# Altium PCB 气象传感器.PcbDoc (part 1 of 2)
Units mm, origin at the board's own origin, x right, y up, seen from the top; angles counter-clockwise.
Board outline 72.46 x 63.14 mm, 2 copper layers (Top Layer, Bottom Layer); 117 components, 86 nets, 422 pads, 155 vias.
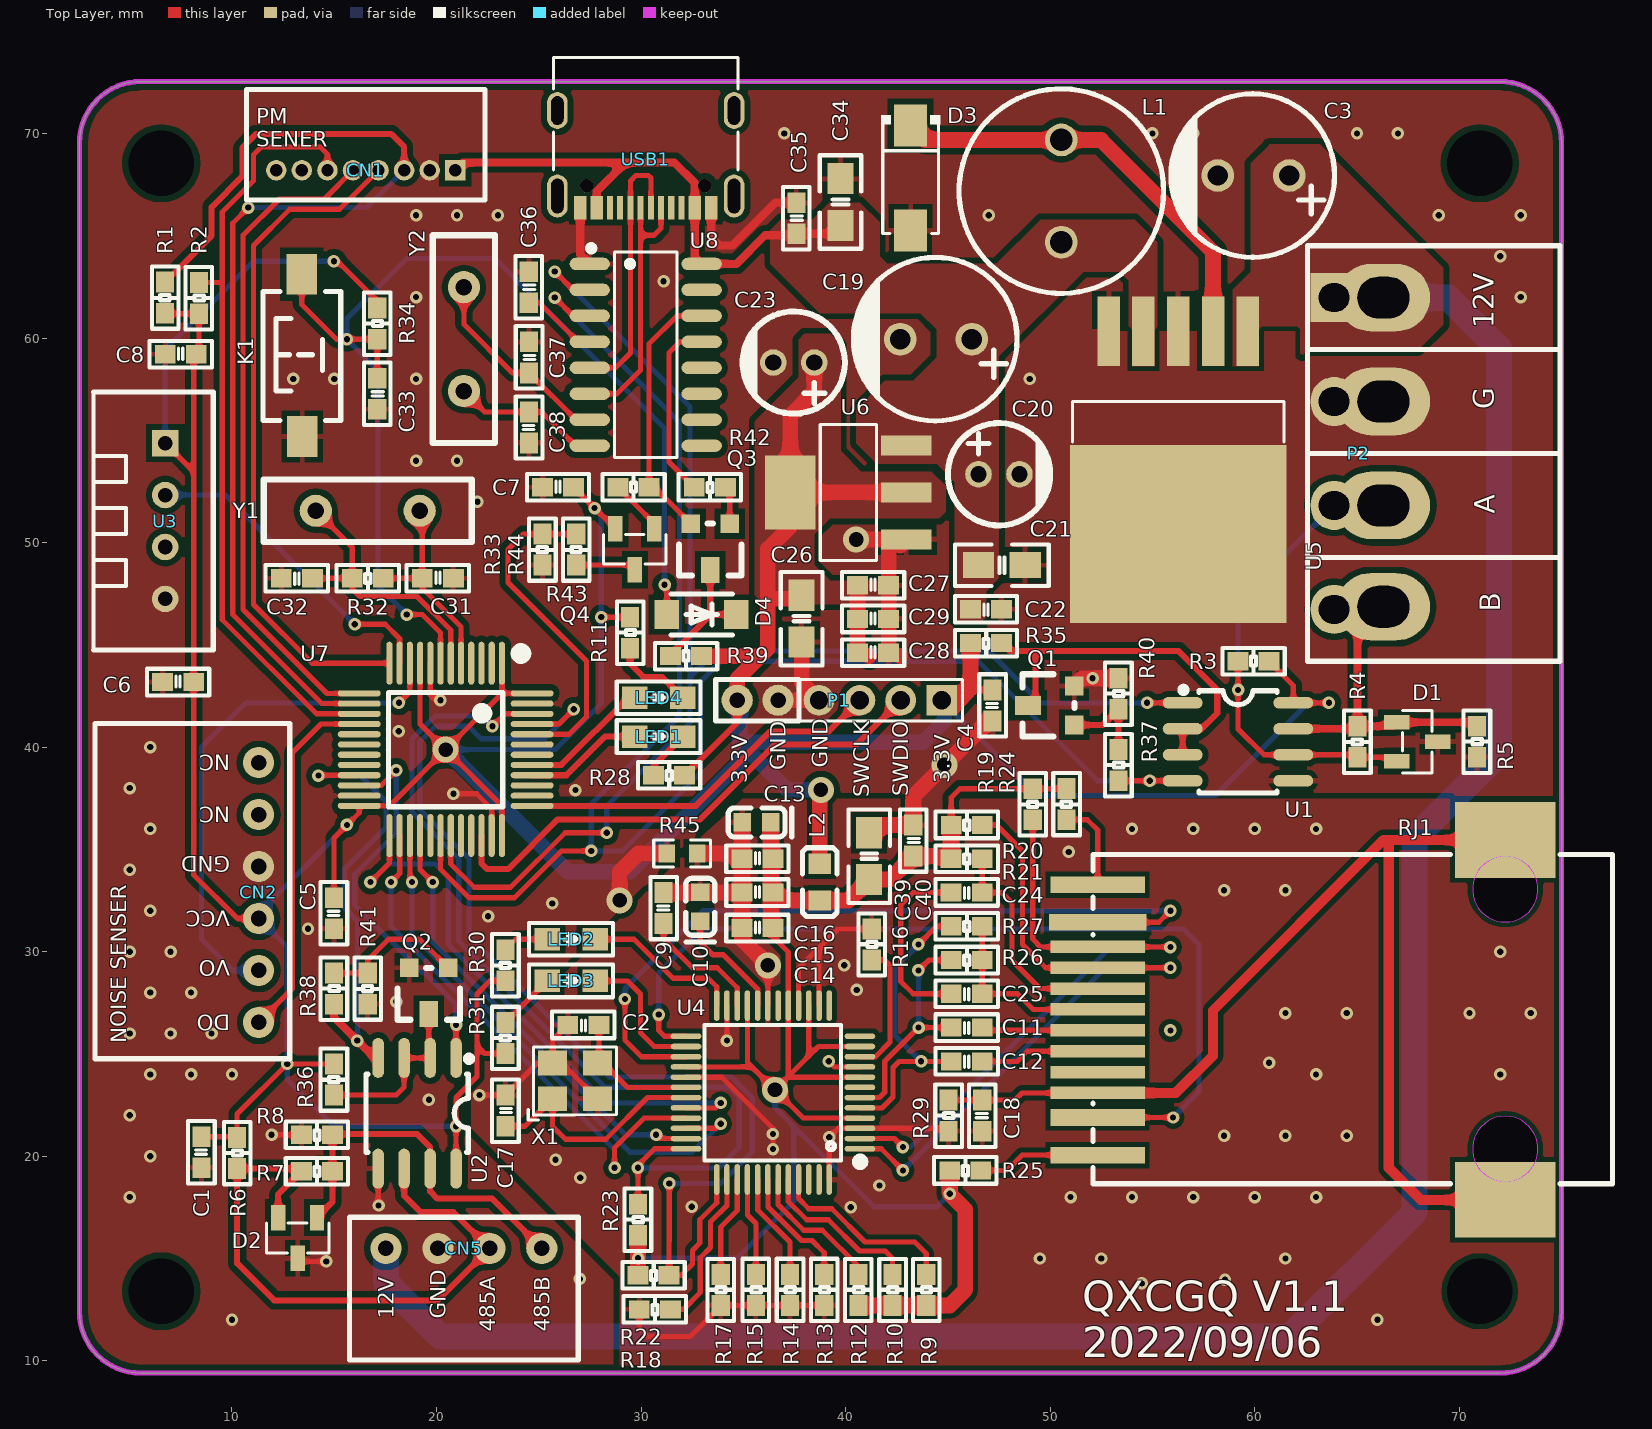
[diagram p0: Top Layer view]
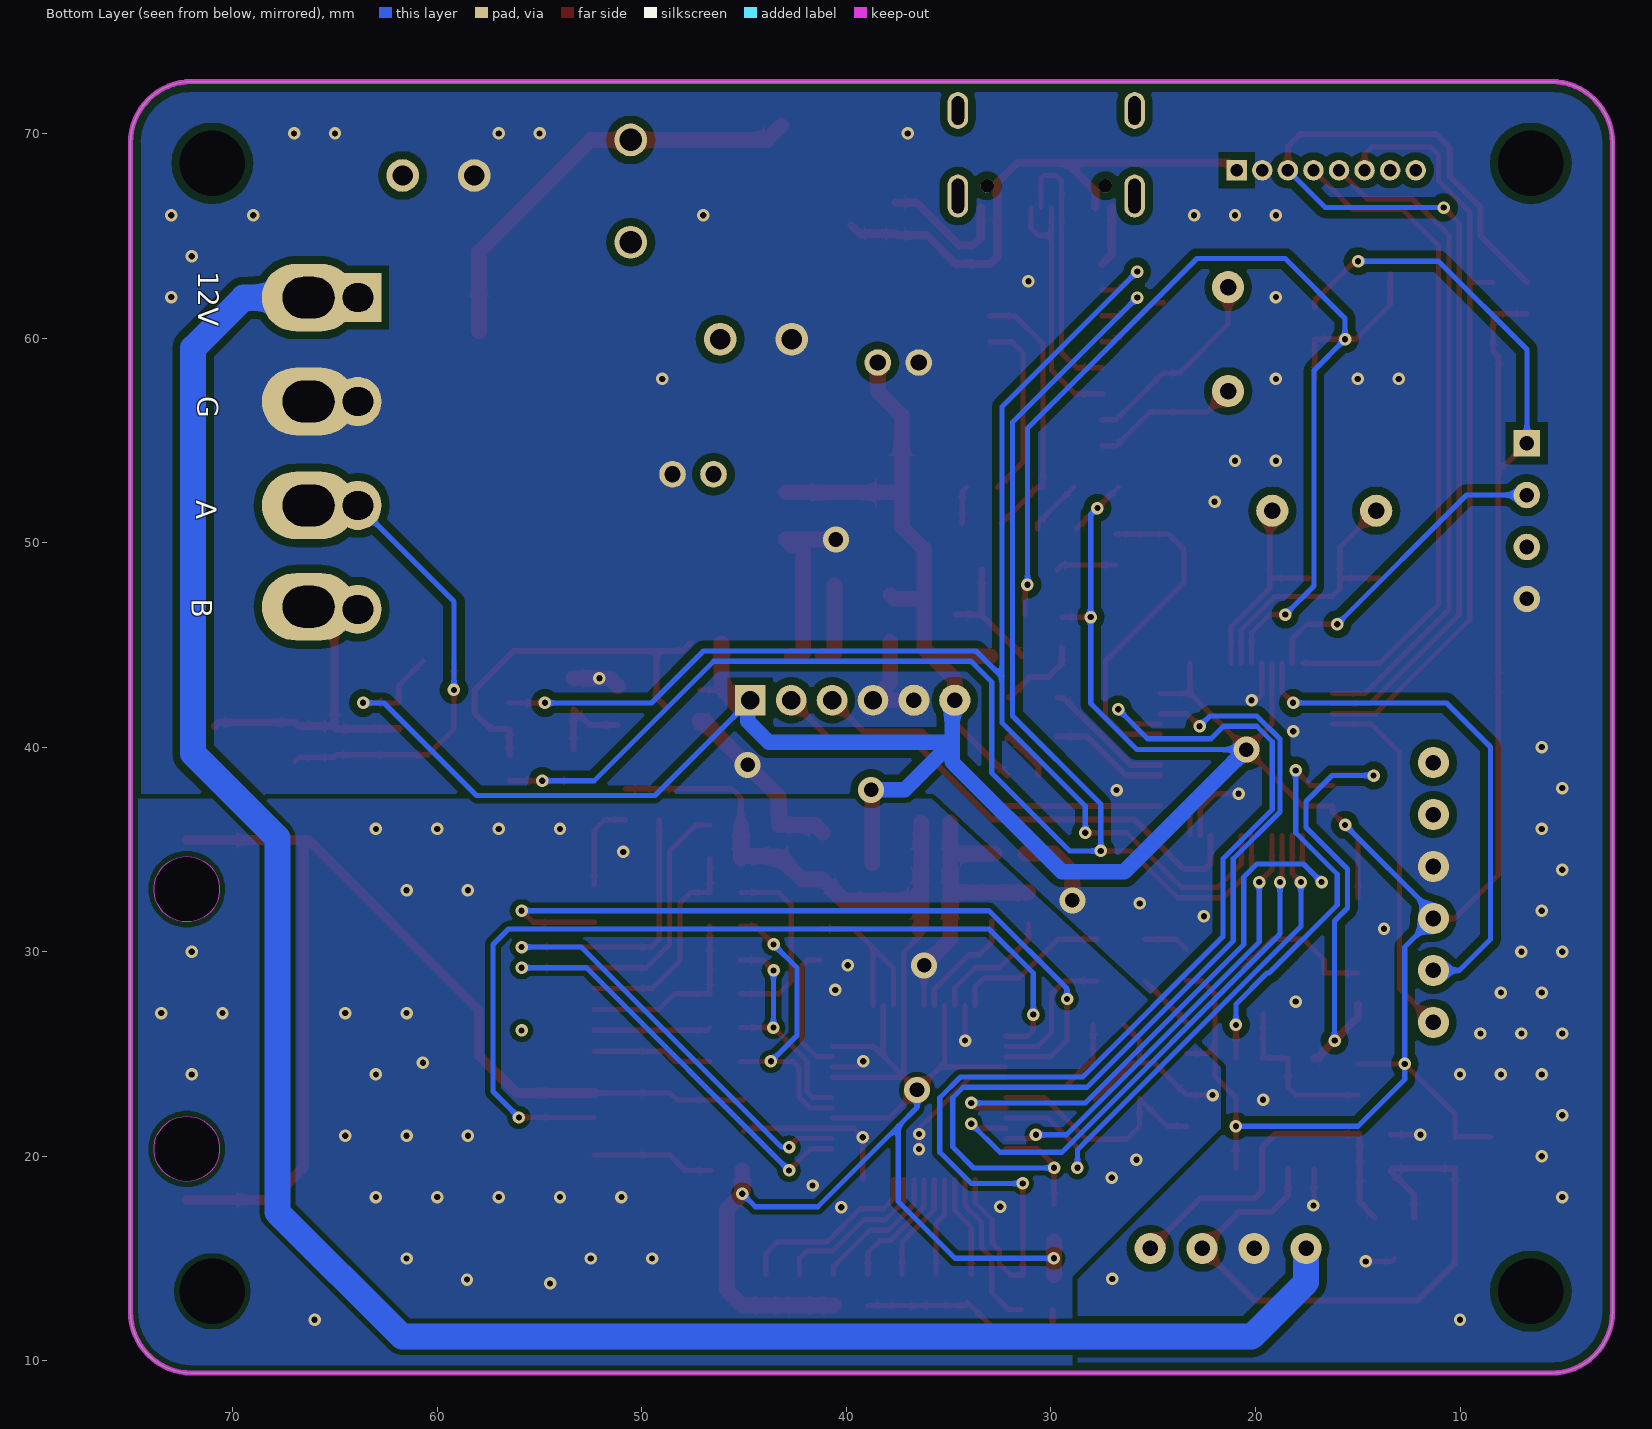
[diagram p1: Bottom Layer view, seen from below]

## Layer stack, top to bottom
Top Solder: solder mask 0.0102, Solder Resist, Dk 3.5
Top Layer: signal copper 0.0356
Dielectric 1: dielectric 0.32, FR-4, Dk 4.8
Bottom Layer: signal copper 0.0356
Bottom Solder: solder mask 0.0102, Solder Resist, Dk 3.5

## Board outline
5.54,9.398 cw(c5.54,12.398) 2.54,12.398 2.54,69.54 cw(c5.54,69.54) 5.54,72.54 72.001,72.54 cw(c72.001,69.54) 75.001,69.54 74.999,69.54 74.999,12.398 cw(c71.999,12.398) 71.999,9.398

## Design rules (kind name [scope] priority, off if disabled: settings)
Clearance Clearance_10 [InNamedPolygon('7805 GND')] p1: gap=0.254 ignorepadtopadclearanceinfootprint=FALSE
Clearance Clearance_9 [InNamedPolygon('TOP GND')] p2: gap=0.3 ignorepadtopadclearanceinfootprint=FALSE
Clearance Clearance_8 [InNamedPolygon('AGND')] p3: gap=0.254 ignorepadtopadclearanceinfootprint=FALSE
Clearance Clearance_7 [InNamedPolygon('AGND')] p4: gap=0.254 ignorepadtopadclearanceinfootprint=FALSE
Clearance Clearance_6 [InNamedPolygon('3.3V')] p5: gap=0.006 ignorepadtopadclearanceinfootprint=FALSE
Clearance Clearance_5 [InNamedPolygon('5V')] p6: gap=0.006 ignorepadtopadclearanceinfootprint=FALSE
Clearance Clearance_4 [InNamedPolygon('12V')] p7: gap=0.006 ignorepadtopadclearanceinfootprint=FALSE
Clearance Clearance_3 [InNamedPolygon('BOTTOM GND')] p8: gap=0.381 ignorepadtopadclearanceinfootprint=FALSE
Clearance Clearance_2 [InNamedPolygon('BOTTOM GND')] p9: gap=0 ignorepadtopadclearanceinfootprint=FALSE
Clearance Clearance_1 [InNamedPolygon('TOP GND')] p10: gap=0.381 ignorepadtopadclearanceinfootprint=FALSE
Clearance [All] p11: gap=0 ignorepadtopadclearanceinfootprint=TRUE
ComponentClearance [All] p1 off: gap=0.254 collisioncheckmode=3 verticalgap=0.254 showdistances=FALSE
HoleSize [All] p1 off: absolutevalues=TRUE maxlimit=2.54 minlimit=0.025 maxpercent=80.000 minpercent=20.000
MinimumSolderMaskSliver [All] p1 off: minsoldermaskwidth=0.127
PolygonConnect PolygonConnect_12 [All vs IsNamedPolygon('BOTTOM GND')] p1: thpad.connectstyle=Direct thpad.reliefconductorwidth=0.254 thpad.reliefentries=4 thpad.polygonreliefangle="90 Angle" thpad.airgapwidth=0.254 smdpad.connectstyle=Relief smdpad.reliefconductorwidth=0.254 smdpad.reliefentries=4 smdpad.polygonreliefangle="90 Angle" smdpad.airgapwidth=0.254 via.connectstyle=Direct via.reliefconductorwidth=0.254 via.reliefentries=4 via.polygonreliefangle="90 Angle" via.airgapwidth=0.254
PolygonConnect PolygonConnect_11 [All vs IsNamedPolygon('TOP GND')] p2: thpad.connectstyle=Direct thpad.reliefconductorwidth=0.254 thpad.reliefentries=4 thpad.polygonreliefangle="90 Angle" thpad.airgapwidth=0.254 smdpad.connectstyle=Relief smdpad.reliefconductorwidth=0.254 smdpad.reliefentries=4 smdpad.polygonreliefangle="90 Angle" smdpad.airgapwidth=0.254 via.connectstyle=Direct via.reliefconductorwidth=0.254 via.reliefentries=4 via.polygonreliefangle="90 Angle" via.airgapwidth=0.254
PolygonConnect PolygonConnect_10 [All vs IsNamedPolygon('AGND')] p3: thpad.connectstyle=Direct thpad.reliefconductorwidth=0.254 thpad.reliefentries=4 thpad.polygonreliefangle="90 Angle" thpad.airgapwidth=0.254 smdpad.connectstyle=Relief smdpad.reliefconductorwidth=0.254 smdpad.reliefentries=4 smdpad.polygonreliefangle="90 Angle" smdpad.airgapwidth=0.254 via.connectstyle=Direct via.reliefconductorwidth=0.254 via.reliefentries=4 via.polygonreliefangle="90 Angle" via.airgapwidth=0.254
PolygonConnect PolygonConnect_9 [All vs IsNamedPolygon('AGND')] p4: thpad.connectstyle=Direct thpad.reliefconductorwidth=0.254 thpad.reliefentries=4 thpad.polygonreliefangle="90 Angle" thpad.airgapwidth=0.254 smdpad.connectstyle=Relief smdpad.reliefconductorwidth=0.254 smdpad.reliefentries=4 smdpad.polygonreliefangle="90 Angle" smdpad.airgapwidth=0.254 via.connectstyle=Direct via.reliefconductorwidth=0.254 via.reliefentries=4 via.polygonreliefangle="90 Angle" via.airgapwidth=0.254
PolygonConnect PolygonConnect_8 [All vs IsNamedPolygon('AGND')] p5: thpad.connectstyle=Direct thpad.reliefconductorwidth=0.254 thpad.reliefentries=4 thpad.polygonreliefangle="90 Angle" thpad.airgapwidth=0.254 smdpad.connectstyle=Relief smdpad.reliefconductorwidth=0.254 smdpad.reliefentries=4 smdpad.polygonreliefangle="90 Angle" smdpad.airgapwidth=0.254 via.connectstyle=Relief via.reliefconductorwidth=0.254 via.reliefentries=4 via.polygonreliefangle="90 Angle" via.airgapwidth=0.254
PolygonConnect PolygonConnect_7 [All vs IsNamedPolygon('AGND')] p6: thpad.connectstyle=Direct thpad.reliefconductorwidth=0.254 thpad.reliefentries=4 thpad.polygonreliefangle="90 Angle" thpad.airgapwidth=0.254 smdpad.connectstyle=Relief smdpad.reliefconductorwidth=0.254 smdpad.reliefentries=4 smdpad.polygonreliefangle="90 Angle" smdpad.airgapwidth=0.254 via.connectstyle=Relief via.reliefconductorwidth=0.254 via.reliefentries=4 via.polygonreliefangle="90 Angle" via.airgapwidth=0.254
PolygonConnect PolygonConnect_6 [All vs IsNamedPolygon('3.3V')] p7: connectstyle=Direct reliefconductorwidth=0.254 reliefentries=4 polygonreliefangle="90 Angle" airgapwidth=0.254
PolygonConnect PolygonConnect_5 [All vs IsNamedPolygon('5V')] p8: connectstyle=Direct reliefconductorwidth=0.254 reliefentries=4 polygonreliefangle="90 Angle" airgapwidth=0.254
PolygonConnect PolygonConnect_4 [All vs IsNamedPolygon('12V')] p9: connectstyle=Direct reliefconductorwidth=0.254 reliefentries=4 polygonreliefangle="90 Angle" airgapwidth=0.254
PolygonConnect PolygonConnect_3 [All vs IsNamedPolygon('7805 GND')] p10: connectstyle=Direct reliefconductorwidth=0.254 reliefentries=4 polygonreliefangle="90 Angle" airgapwidth=0.254
PolygonConnect PolygonConnect_2 [All vs IsNamedPolygon('TOP GND')] p11: thpad.connectstyle=Relief thpad.reliefconductorwidth=0.254 thpad.reliefentries=4 thpad.polygonreliefangle="90 Angle" thpad.airgapwidth=0.254 smdpad.connectstyle=Relief smdpad.reliefconductorwidth=0.254 smdpad.reliefentries=4 smdpad.polygonreliefangle="90 Angle" smdpad.airgapwidth=0.254 via.connectstyle=Direct via.reliefconductorwidth=0.254 via.reliefentries=4 via.polygonreliefangle="90 Angle" via.airgapwidth=0.254
PolygonConnect PolygonConnect_1 [All vs IsNamedPolygon('BOTTOM GND')] p12: thpad.connectstyle=Relief thpad.reliefconductorwidth=0.254 thpad.reliefentries=4 thpad.polygonreliefangle="90 Angle" thpad.airgapwidth=0.254 smdpad.connectstyle=Relief smdpad.reliefconductorwidth=0.254 smdpad.reliefentries=4 smdpad.polygonreliefangle="90 Angle" smdpad.airgapwidth=0.254 via.connectstyle=Direct via.reliefconductorwidth=0.254 via.reliefentries=4 via.polygonreliefangle="90 Angle" via.airgapwidth=0.254
PolygonConnect [All] p13: connectstyle=Relief reliefconductorwidth=0.254 reliefentries=4 polygonreliefangle="90 Angle" airgapwidth=0.254
RoutingVias [All] p1: holewidth=0.711 width=1.27 viastyle="Through Hole" minholewidth=0.025 minwidth=0.025 maxholewidth=2.54 maxwidth=2.54
ShortCircuit [All] p1 off: allowed=FALSE
SilkToSilkClearance [All] p1 off: silktosilkclearance=0.254
SilkToSolderMaskClearance [IsPad] p1 off: minsilkscreentomaskgap=0.254 clearancetoexposedcopper=TRUE
SolderMaskExpansion [All] p1: expansion=0.102
Width [All] p1: maxlimit=2.54 minlimit=0.254 preferedwidth=0.254
24 further rules are at their usual default settings.

## Components (designator, comment, footprint, x,y, rotation, side; value= is the part's Value field where it differs from the comment)
C1 "Capacitor" 0603C 8.509,20.195 r270 top value=0.1uf
C2 "Capacitor" 0603C 27.178,26.416 r0 top value=12pf
C3 "Capacitor" CAP-TH_BD8.0-P3.50-D0.6-FD 59.944,67.945 r180 top value="100uf 50v"
C4 "Capacitor" 0603C 47.18,42.037 r270 top value=0.1uf
C5 "Capacitor" 0603C 14.986,31.877 r270 top value=0.1uf
C6 "Capacitor" 0603C 7.366,43.18 r180 top value=0.1uf
C7 "Capacitor" 0603C 25.938,52.705 r180 top value=0.1uf
C8 "Capacitor" 0603C 7.493,59.208 r180 top value=0.1uf
C9 "Capacitor" 0603C 31.103,32.131 r270 top value=10nf
C10 "4.7uF" CAP-SMD_L1.6-W0.9-FD 32.891,32.196 r90 top
C11 "Capacitor" 0603C 45.92,26.289 r0 top value=6.8nf
C12 "Capacitor" 0603C 45.92,24.638 r0 top value=6.8nf
C13 "4.7uF" CAP-SMD_L1.6-W0.9-FD 35.648,36.318 r180 top
C14 "Capacitor" 0603C 35.689,31.153 r180 top value=0.1uf
C15 "Capacitor" 0603C 35.689,32.889 r180 top value=0.1uf
C16 "Capacitor" 0603C 35.689,34.54 r180 top value=0.1uf
C17 "Capacitor" 0603C 23.368,22.227 r90 top value=12pf
C18 "Capacitor" 0603C 46.682,21.982 r270 top value=1nf
C19 "Capacitor" CAP-TH_BD8.0-P3.50-D0.6-FD 44.422,59.944 r180 top value="1000uf 10v"
C20 "Capacitor" CAP-TH_BD5.0-P2.00-D0.8-FD 47.498,53.34 r0 top value="100uf 16v"
C21 "Capacitor" 0805C 46.498,48.895 r0 top value=10uf
C22 "Capacitor" 0603C 46.863,46.736 r0 top value=0.1uf
C23 "Capacitor" CAP-TH_BD5.0-P2.00-D0.8-FD 37.465,58.801 r180 top value="100uf 16v"
C24 "Capacitor" 0603C 45.918,32.893 r0 top value=22nf
C25 "Capacitor" 0603C 45.92,27.94 r0 top value=10nf
C26 "Capacitor" 0805C 37.846,45.138 r90 top value=10uf
C27 "Capacitor" 0603C 41.341,47.917 r180 top value=0.1uf
C28 "Capacitor" 0603C 41.343,44.615 r180 top value=100pf
C29 "Capacitor" 0603C 41.341,46.266 r180 top value=22pf
C31 "Capacitor" 0603C 20.064,48.254 r180 top value=22pf
C32 "Capacitor" 0603C 13.17,48.254 r0 top value=22pf
C33 "Capacitor" 0603C 17.098,57.273 r90 top value=0.1uf
C34 "Capacitor" 0805C 39.751,65.507 r90 top value=10uf
C35 "Capacitor" 0603C 37.592,65.858 r90 top value=0.1uf
C36 "Capacitor" 0603C 24.511,62.482 r90 top value=0.1uf
C37 "Capacitor" 0603C 24.523,59.055 r90 top value=20pf
C38 "Capacitor" 0603C 24.523,55.626 r270 top value=20pf
C39 "Capacitor" 0805C 41.148,33.528 r90 top value=10uf
C40 "Capacitor" 0603C 43.307,35.431 r90 top value=0.1uf
CN1 "DF13-8P-1.25DS(20)" CONN-TH_8P-P1.25_DF13-8P-1.25DS-20 16.54,68.199 r0 top
CN2 "NOISE_SENSER" NOISE_SENSER 11.303,26.543 r90 top
CN5 "RAIN_SENSER" RAIN_SENSER 17.526,15.494 r0 top
D1 "SM712_C908219" SOT-23-3_L2.9-W1.3-P1.90-LS2.4-BR 67.945,40.261 r180 top
D2 "SM712_C908219" SOT-23-3_L2.9-W1.3-P1.90-LS2.4-BR 13.208,16.002 r90 top
D3 "1N5822" SMA_L4.4-W2.8-LS5.4-RD 43.18,67.818 r270 top
D4 "1N4148W-C1884539" SOD-123_4148 32.962,46.482 r0 top
K1 "3x6x5" "TSW SMD-3*6*2.5" 13.415,59.182 r90 top
L1 "100uH" IND-TH_BD10.0-P5.00-D0.7 50.546,67.183 r90 top
L2 "120欧磁珠" L0603 38.735,33.401 r270 top
LED1 "LED" 0603-LED 30.861,40.513 r0 top
LED2 "LED" 0603-LED 26.579,30.607 r180 top
LED3 "LED" 0603-LED 26.579,28.573 r180 top
LED4 "LED" 0603-LED 30.861,42.418 r0 top
P1 "SWD_LINK" SWD_LINK 44.699,42.291 r180 top
P2 "XH2.54_4P" "5.08 LINKER 1*4" 74.168,61.214 r270 top
Q1 "S8050" SOT-23 50.165,42.037 r0 top
Q2 "S8050" SOT-23 19.622,28.194 r90 top
Q3 "S8050" SOT-23 33.379,49.911 r90 top
Q4 "S8550" SOT-23-3_L2.9-W1.3-P1.90-LS2.4-BR 29.693,49.673 r90 top
R1 "Resistor" 0603R 6.731,61.976 r270 top value=10k
R2 "Resistor" 0603R 8.382,61.951 r90 top value=10k
R3 "Resistor" 0603R 59.944,44.196 r180 top value=100k
R4 "Resistor" 0603R 65.024,40.261 r270 top value=120R
R5 "Resistor" 0603R 70.866,40.261 r90 top value=100k
R6 "Resistor" 0603R 10.251,20.154 r90 top value=100k
R7 "Resistor" 0603R 14.152,19.267 r0 top value=120R
R8 "Resistor" 0603R 14.152,21.045 r0 top value=100k
R9 "Resistor" 0603R 43.942,13.462 r90 top value=10K
R10 "Resistor" 0603R 42.294,13.462 r90 top value=10K
R11 "Resistor" 0603R 29.464,45.593 r90 top value=4.7K
R12 "Resistor" 0603R 40.624,13.462 r90 top value=10K
R13 "Resistor" 0603R 38.954,13.464 r90 top value=10K
R14 "Resistor" 0603R 37.283,13.464 r90 top value=10K
R15 "Resistor" 0603R 35.613,13.464 r90 top value=10K
R16 "Resistor" 0603R 41.275,30.353 r90 top value="12.4k 1%"
R17 "Resistor" 0603R 33.893,13.462 r90 top value=10K
R18 "Resistor" 0603R 30.674,12.512 r0 top value=10K
R19 "Resistor" 0603R 49.149,37.209 r270 top value=51R
R20 "Resistor" 0603R 45.92,36.195 r0 top value=51R
R21 "Resistor" 0603R 45.918,34.544 r0 top value=10R
R22 "Resistor" 0603R 30.611,14.182 r0 top value=10K
R23 "Resistor" 0603R 29.845,16.891 r90 top value=10K
R24 "Resistor" 0603R 50.8,37.213 r270 top value=1K
R25 "Resistor" 0603R 45.847,19.304 r0 top value=1K
R26 "Resistor" 0603R 45.92,29.591 r0 top value=82R
R27 "Resistor" 0603R 45.92,31.242 r0 top value=82R
R28 "Resistor" 0603R 31.369,38.628 r0 top value=1K
R29 "Resistor" 0603R 45.031,21.982 r90 top value=1M
R30 "Resistor" 0603R 23.368,29.339 r270 top value=1K
R31 "Resistor" 0603R 23.368,25.781 r270 top value=1K
R32 "Resistor" 0603R 16.635,48.254 r0 top value=1M
R33 "Resistor" 0603R 25.178,49.657 r270 top value=10K
R34 "Resistor" 0603R 17.098,60.704 r90 top value=1M
R35 "Resistor" 0603R 46.863,45.085 r0 top value=100k
R36 "Resistor" 0603R 14.986,23.747 r270 top value=100k
R37 "Resistor" 0603R 53.34,39.118 r90 top value=100k
R38 "Resistor" 0603R 14.986,28.194 r90 top value=100k
R39 "Resistor" 0603R 32.199,44.45 r180 top value=10K
R40 "Resistor" 0603R 53.34,42.608 r90 top value=100k
R41 "Resistor" 0603R 16.637,28.194 r270 top value=100k
R42 "Resistor" 0603R 33.364,52.705 r0 top value=1K
R43 "Resistor" 0603R 29.632,52.705 r180 top value=1K
R44 "Resistor" 0603R 26.829,49.657 r270 top value=1K
R45 "0R" R0603 32.004,34.798 r180 top value=33Ω
RJ1 "HR961160C" RJ45-SMD_HR961160C 62.285,26.664 r270 top
U1 "SP3485EN-L/TR" SOIC-8_L5.0-W4.0-P1.27-LS6.0-BL 59.182,40.259 r270 top
U2 "SP3485EN-L/TR" SOIC-8_L5.0-W4.0-P1.27-LS6.0-BL 19.05,22.098 r180 top
U3 "DHT11" DHT11 6.731,51.054 r270 top
U4 "W5500" LQFP-48_L7.0-W7.0-P0.50-LS9.0-BL 36.449,23.114 r90 top
U5 "LM2576S-5.0_C2920854" TO-263-5_L10.2-W8.6-P1.70-LS14.4-TL 56.261,55.372 r270 top
U6 "AMS1117-3.3_C369933" SOT-223-4_L6.5-W3.5-P2.30-LS7.0-BR 40.132,52.451 r0 top
U7 "STM32F103C8T6" "LQFP48 7X7_M" 20.447,39.878 r180 top
U8 "CH340G" SOIC-16_L9.9-W3.9-P1.27-LS6.0-BL 30.226,59.18 r270 top
USB1 "TYPEC-304A-ACP16O" USB-SMD_TYPEC-304A-ACP16O 30.228,68.748 r180 top
X1 "JYXT32S4-025.00000-93E4C0" OSC-SMD_4P-L3.2-W2.5-BL 26.771,23.682 r0 top value=-
Y1 "8MHZ" XTAL1 16.637,51.556 r0 top
Y2 "12MHz" XTAL1 21.336,59.944 r90 top

## Footprints (in the part's own frame and the unit in brackets; to place one, negate y for a bottom-side part, rotate by r counter-clockwise, add the part's x,y. Pads: shape width x height; smd on the part's side, far side on the other; paste and mask are expansions set on the pad)
"5.08 LINKER 1*4" [mil] "5.08MM间距接线端子"
  oval 130x180 hole 80 slot 100 at 90 deg: 1(-30,-310) 2(170,-310) 3(370,-310) 4(565,-310)
  rect 94.49x90.55 hole 59.06 slot 55.12 at 0 deg: 1(-30,-405)
  oval 94.49x90.55 hole 59.06 slot 55.12 at 0 deg: 2(170,-405) 3(370,-405) 4(570,-405)
  silkscreen extent -130,-456 670,30
0603-LED [mil]
  rect 49x43 smd: 1(46.26,0) 2(-46.26,0)
  silkscreen extent -81,-31 81,31
0603C [mil]
  rect 40x35 smd: 1(-29.92,0) 2(29.92,0)
  silkscreen extent -60,-26 60,26
0603R [mil]
  rect 40x35 smd: 1(-29.92,0) 2(29.92,0)
  silkscreen extent -60,-26 60,26
0805C [mil]
  rect 60x50 smd: 1(0,0) 2(90,0)
  silkscreen extent -45,-40 135,40
CAP-SMD_L1.6-W0.9-FD [mm] "钽电容"
  rect 0.85x0.9 smd mask+0.051: 1(-0.7,0) 2(0.7,0)
  silkscreen extent -1.72,-0.71 1.39,0.71
CAP-TH_BD5.0-P2.00-D0.8-FD [mm] "5*11 （16v 100uf）"
  round 1.3 hole 0.8: 1(-1,0) 2(1,0)
  silkscreen extent -2.5,-2.5 2.5,2.5
CAP-TH_BD8.0-P3.50-D0.6-FD [mm] "8*12 (100uf 50v) (1000uf 10v)"
  round 1.6 hole 1: 1(-1.75,0) 2(1.75,0)
  silkscreen extent -3.96,-4 4.04,4
CONN-TH_8P-P1.25_DF13-8P-1.25DS-20 [mm]
  rect 1x1 hole 0.6: 1(4.375,0)
  round 1 hole 0.6: 2(3.125,0) 3(1.875,0) 4(0.625,0) 5(-0.625,0) 6(-1.875,0) 7(-3.125,0) 8(-4.375,0)
  silkscreen extent -5.83,-1.45 5.83,3.95
DHT11 [mil]
  rect 51x51 hole 28: 1(-150,0)
  round 51 hole 28: 2(-50,0) 3(50,0) 4(150,0)
  silkscreen extent -248,-138 248,93
IND-TH_BD10.0-P5.00-D0.7 [mm] "100uh 电感"
  round 1.6 hole 1.1: 1(-2.5,0) 2(2.5,0)
  silkscreen extent -5,-5 5,5
L0603 [mm]
  rect 1x1.1 smd: 1(-0.9,0) 2(0.9,0)
  silkscreen extent -1.68,-0.85 1.68,0.85
"LQFP48 7X7_M" [mm] "48脚，体宽7x7mm，脚距0.5mm      淘宝ID:黄晶宝石"
  oval 0.3x2.1 smd: 1(-2.75,-4.227) 2(-2.25,-4.227) 3(-1.75,-4.227) 4(-1.25,-4.227) 5(-0.75,-4.227) 6(-0.25,-4.227) 7(0.25,-4.227) 8(0.75,-4.227) 9(1.25,-4.227) 10(1.75,-4.227) 11(2.25,-4.227) 12(2.75,-4.227) 25(2.75,4.202) 26(2.25,4.202) 27(1.75,4.202) 28(1.25,4.202) 29(0.75,4.202) 30(0.25,4.202) 31(-0.25,4.202) 32(-0.75,4.202) 33(-1.25,4.202) 34(-1.75,4.202) 35(-2.25,4.202) 36(-2.75,4.202)
  oval 2.1x0.3 smd: 13(4.227,-2.75) 14(4.227,-2.25) 15(4.227,-1.75) 16(4.227,-1.25) 17(4.227,-0.75) 18(4.227,-0.25) 19(4.227,0.25) 20(4.227,0.75) 21(4.227,1.25) 22(4.227,1.75) 23(4.227,2.25) 24(4.227,2.75) 37(-4.227,2.75) 38(-4.227,2.25) 39(-4.227,1.75) 40(-4.227,1.25) 41(-4.227,0.75) 42(-4.227,0.25) 43(-4.227,-0.25) 44(-4.227,-0.75) 45(-4.227,-1.25) 46(-4.227,-1.75) 47(-4.227,-2.25) 48(-4.227,-2.75)
  silkscreen extent -3.93,-4.95 2.79,2.79, body extent -4.5,-4.5 4.5,4.5, height 1.45
LQFP-48_L7.0-W7.0-P0.50-LS9.0-BL [mm] "W5500-以太网控制芯片"
  oval 0.27x1.5 smd mask+0.05: 1(-2.75,-4.25) 2(-2.25,-4.25) 3(-1.75,-4.25) 4(-1.25,-4.25) 5(-0.75,-4.25) 6(-0.25,-4.25) 7(0.25,-4.25) 8(0.75,-4.25) 9(1.25,-4.25) 10(1.75,-4.25) 11(2.25,-4.25) 12(2.75,-4.25) 25(2.75,4.25) 26(2.25,4.25) 27(1.75,4.25) 28(1.25,4.25) 29(0.75,4.25) 30(0.25,4.25) 31(-0.25,4.25) 32(-0.75,4.25) 33(-1.25,4.25) 34(-1.75,4.25) 35(-2.25,4.25) 36(-2.75,4.25)
  oval 1.5x0.27 smd mask+0.05: 13(4.25,-2.75) 14(4.25,-2.25) 15(4.25,-1.75) 16(4.25,-1.25) 17(4.25,-0.75) 18(4.25,-0.25) 19(4.25,0.25) 20(4.25,0.75) 21(4.25,1.25) 22(4.25,1.75) 23(4.25,2.25) 24(4.25,2.75) 37(-4.25,2.75) 38(-4.25,2.25) 39(-4.25,1.75) 40(-4.25,1.25) 41(-4.25,0.75) 42(-4.25,0.25) 43(-4.25,-0.25) 44(-4.25,-0.75) 45(-4.25,-1.25) 46(-4.25,-1.75) 47(-4.25,-2.25) 48(-4.25,-2.75)
  silkscreen extent -3.59,-4.46 3.3,3.34
NOISE_SENSER [mil] "噪声传感器"
  round 60 hole 30: 1(0,0) 2(100,0) 3(200,0) 4(300,0) 5(400,0) 6(500,0)
  silkscreen extent -70,-60 575,315
OSC-SMD_4P-L3.2-W2.5-BL [mm] "25MHz晶振"
  rect 1.4x1.2 smd mask+0.051: 1(-1.1,-0.875) 2(1.1,-0.875) 3(1.1,0.875) 4(-1.1,0.875)
  silkscreen extent -2.29,-1.9 2.03,1.65
R0603 [mm]
  rect 0.806x0.864 smd mask+0.051: 1(-0.753,0) 2(0.753,0)
  silkscreen extent -1.39,-0.66 1.39,0.66
RAIN_SENSER [mil]
  round 60 hole 30: 1(0,0) 2(100,0) 3(200,0) 4(300,0)
  silkscreen extent -70,-215 370,60
RJ45-SMD_HR961160C [mm] "RJ45"
  rect 0.81x4.6 smd mask+0.051: 1(-6.61,-9.961) 11(4.77,-9.961) 12(6.61,-9.961)
  rect 0.81x4.77 smd mask+0.051: 2(-4.77,-9.961)
  rect 0.61x4.6 smd mask+0.051: 3(-3.57,-9.961) 4(-2.55,-9.961) 5(-1.53,-9.961) 6(-0.51,-9.961) 7(0.51,-9.961) 8(1.53,-9.961) 9(2.55,-9.961) 10(3.57,-9.961)
  rect 3.7x4.9 smd mask+0.051: 13(8.799,9.961) 14(-8.799,9.961)
  Keep-Out Layer board cut-out: -4.791,9.961 -4.949,10.655 -5.393,11.212 -6.035,11.521 -6.747,11.521 -7.389,11.212 -7.833,10.655 -7.991,9.961 -7.991,9.961 -7.833,9.267 -7.389,8.71 -6.747,8.401 -6.035,8.401 -5.393,8.71 -4.949,9.267 -4.791,9.961
  Keep-Out Layer board cut-out: 7.909,9.961 7.751,10.655 7.307,11.212 6.665,11.521 5.953,11.521 5.311,11.212 4.867,10.655 4.709,9.961 4.709,9.961 4.867,9.267 5.311,8.71 5.953,8.401 6.665,8.401 7.307,8.71 7.751,9.267 7.909,9.961
  silkscreen extent -8.09,-10.19 8.01,15.21
SMA_L4.4-W2.8-LS5.4-RD [mm]
  rect 2.046x1.62 smd mask+0.051: 1(-2.565,0) 2(2.565,0)
  silkscreen extent -3.08,-1.44 2.7,1.44
SOD-123_4148 [mm]
  rect 1.2x1.4 smd: 1(1.7,0) 2(-1.7,0)
  silkscreen extent -1.5,-1 1.5,1
SOIC-8_L5.0-W4.0-P1.27-LS6.0-BL [mil]
  oval 22.38x76.78 smd: 1(-75,-106.5) 2(-25,-106.5) 3(25,-106.5) 4(75,-106.5) 5(75,106.5) 6(25,106.5) 7(-25,106.5) 8(-75,106.5)
  silkscreen extent -106,-111 98,75
SOIC-16_L9.9-W3.9-P1.27-LS6.0-BL [mm]
  oval 0.602x1.971 smd mask+0.051: 1(-4.445,-2.736) 2(-3.175,-2.736) 3(-1.905,-2.736) 4(-0.635,-2.736) 5(0.635,-2.736) 6(1.905,-2.736) 7(3.175,-2.736) 8(4.445,-2.736) 9(4.445,2.736) 10(3.175,2.736) 11(1.905,2.736) 12(0.635,2.736) 13(-0.635,2.736) 14(-1.905,2.736) 15(-3.175,2.736) 16(-4.445,2.736)
  silkscreen extent -5.36,-2.82 5.03,1.52
SOT-23 [mil]
  rect 35.98x35.98 smd: 1(40,-37.52) 2(40,37.52)
  rect 50x35.98 smd: 3(-49.2,0)
  silkscreen extent -60,-60 40,60
SOT-23-3_L2.9-W1.3-P1.90-LS2.4-BR [mm]
  rect 1.25x0.7 smd: 1(1,-0.95) 2(1,0.95) 3(-1,0)
  silkscreen extent -0.73,-1.53 0.73,1.53
SOT-223-4_L6.5-W3.5-P2.30-LS7.0-BR [mm] "AMS1117-3V3"
  rect 2.47x0.98 smd: 1(2.835,-2.3) 2(2.835,0) 3(2.835,2.3)
  rect 2.47x3.6 smd: 4(-2.835,0)
  silkscreen extent -1.37,-3.33 1.37,3.33
SWD_LINK [mm] "Connector; Header; 10x2 Position"
  rect 1.5x1.5 hole 0.9: 1(0,0)
  round 1.5 hole 0.9: 2(2,0) 3(4,0) 4(6,0)
  round 1.524 hole 0.762: 5(8,0) 6(10,0)
  silkscreen extent -1.02,-1.02 11.05,1.02
TO-263-5_L10.2-W8.6-P1.70-LS14.4-TL [mm] "LM2576S-5V       开关稳压器"
  rect 3.4x1.1 smd: 1(-4.953,3.4) 2(-4.953,1.7) 3(-4.953,0) 4(-4.953,-1.7) 5(-4.953,-3.4)
  rect 8.705x10.587 smd: 6(4.953,0)
  silkscreen extent -1.52,-5.17 0.45,5.17
"TSW SMD-3*6*2.5" [mm] "3*6*2.5mm"
  rect 2x1.5 smd: 1(-3.996,-0.02) 2(3.937,0)
  silkscreen extent -3.21,-1.9 3.09,1.9, body extent -4,-1.88 4,1.62, height 2.59
USB-SMD_TYPEC-304A-ACP16O [mm]
  oval 1x2.1 hole 0.6 slot 1.7 at 90 deg: 12(-4.32,1.808) 13(4.32,1.808)
  oval 1x1.8 hole 0.6 slot 1.4 at 90 deg: 14(-4.32,-2.372) 15(4.32,-2.372)
  rect 0.6x1.15 smd: A1B12(-3.2,2.373) A4B9(-2.4,2.373) B1A12(3.2,2.373) B4A9(2.4,2.373)
  rect 0.3x1.15 smd: A5(-1.25,2.373) A6(-0.25,2.373) A7(0.25,2.373) A8(1.25,2.373) B5(1.75,2.373) B6(0.75,2.373) B7(-0.75,2.373) B8(-1.75,2.373)
  round 0.65 hole 0.65 unplated: ""(-2.89,1.307) ""(2.89,1.307)
  silkscreen extent -4.5,-4.97 4.5,0.53
XTAL1 [mil]
  round 62 hole 32: 1(-100,0) 2(100,0)
  silkscreen extent -200,-60 200,60

## Part data
C1 C2 C4 C5 C6 C7 C8 C9 C11 C12 C14 C15 C16 C17 C18 C21 C22 C24 C25 C26 C27 C28 C29 C31 C32 C33 C34 C35 C36 C37 C38 C39 C40: library part CAP
C3 C19 C20 C23: library part CAP+
C10 C13: library part F980J106MMA, "钽电容", JLCPCB Part Class="Extended Part", Manufacturer="Kyocera AVX", Add into BOM=yes, Convert to PCB=yes, Datasheet=https://atta.szlcsc.com/upload/public/pdf/source/20211207/218718C9D5A7FAAA07FA57F61A08BACF.pdf, Device=F980J106MMA, LCSC Part Name=钽电容, Manufacturer Part=F980J106MMA, Name=F980J106MMA, Supplier=LCSC, Supplier Footprint=0603, Supplier Part=C4153836, Symbol=F980J106MMA
CN1: BOM_JLCPCB Part Class="Extended Part", BOM_Manufacturer=HRS(Hirose), BOM_Manufacturer Part=DF13-8P-1.25DS(20), BOM_Supplier=LCSC, BOM_Supplier Part=C597874, Contributor=LCSC, spicePre=C, spiceSymbolName=DF13-8P-1.25DS(20)
CN5: "雨量传感器接口"
D1 D2: BOM_JLCPCB Part Class="Extended Part", BOM_Manufacturer=FUXINSEMI, BOM_Manufacturer Part=SM712, BOM_Supplier=LCSC, BOM_Supplier Part=C908219, Contributor=LCSC, spicePre=D, spiceSymbolName=SM712_C908219
D3: BOM_JLCPCB Part Class="Extended Part", BOM_Manufacturer=KEXIN, BOM_Manufacturer Part=1N5819, BOM_Supplier=LCSC, BOM_Supplier Part=C437199, Contributor=LCSC, spicePre=D, spiceSymbolName=1N5819_C437199
D4: BOM_JLCPCB Part Class="Extended Part", BOM_Manufacturer=YFW佑风微, BOM_Manufacturer Part=1N4148W, BOM_Supplier=LCSC, BOM_Supplier Part=C1884539, Contributor=LCSC, spicePre=D, spiceSymbolName=1N4148W-C1884539
K1: library part "TSW 3x6", "3x6轻触开关", BOM名称=3x6轻触开关, 学习资源=www.ooocke.com, 版权归属=源创客
L1: library part L, "Inductance", BOM_JLCPCB Part Class="Extended Part", BOM_Manufacturer=FH, BOM_Manufacturer Part=VLU0810-101K, BOM_Supplier=LCSC, BOM_Supplier Part=C72630, nameAlias=Inductance, spicePre=L, spiceSymbolName=VLU0810-101K
L2: library part GZ1608D121TF, "磁珠", Current Rating=300mA, DC Resistance=200mΩ, Impedance @ Frequency=120Ω@100MHz, JLCPCB Part Class="Extended Part", LCSC Part Name="120Ω@100MHz ±25%", Manufacturer=Sunlord(顺络), Tolerance=±25%, Add into BOM=yes, Circuits=1, Convert to PCB=yes, Datasheet=https://atta.szlcsc.com/upload/public/pdf/source/20210830/355EA7C0FAC5394FC0FE3F17C770C20A.pdf, Device=GZ1608D121TF, Manufacturer Part=GZ1608D121TF, Name=GZ1608D121TF, Supplier=LCSC, Supplier Footprint=0603, Supplier Part=C12391, Symbol=GZ1608D121TF-C12391
Q1 Q2 Q3: BOM_Manufacturer=BORN伯恩半导体, BOM_Manufacturer Part=S8050, BOM_Supplier=LCSC, BOM_Supplier Part=C266592, Contributor=mengruisheng, spicePre=Q, spiceSymbolName=NPN
Q4: Collector-Emitter Breakdown Voltage (Vceo)=25V, Collector-Emitter Saturation Voltage (VCE(sat)@Ic,Ib)=600mV@500mA,50mA, Collector Current (Ic)=500mA, DC Current Gain (hFE@Ic,Vce)=-, JLCPCB Part Class="Extended Part", Manufacturer=UMW(友台半导体), Operating Temperature=+150℃@(Tj), Power Dissipation (Pd)=300mW, Transition Frequency (fT)=150MHz, Add into BOM=yes, Convert to PCB=yes, Datasheet=https://atta.szlcsc.com/upload/public/pdf/source/20211011/8CBA04D874BE5A0FC10F979D18183A3A.pdf, Device=S8550, LCSC Part Name=S8550, Manufacturer Part=S8550, Name=S8550, Supplier=LCSC, Supplier Footprint=SOT-23-3, Supplier Part=C545533, Symbol=S8550_C545533, Transistor Type=PNP
R1 R2 R3 R4 R5 R6 R7 R8 R9 R10 R11 R12 R13 R14 R15 R16 R17 R18 R19 R20 R21 R22 R23 R24 R25 R26 R27 R28 R29 R30 R31 R32 R33 R34 R35 R36 R37 R38 R39 R40 R41 R42 R43 R44: library part RES, "Resistor SMD - IEC symbol version", LatestRevisionDate="27-Jul-20  -  Semtech"
R45: library part TC0325B330JT5E, "电阻", JLCPCB Part Class="Extended Part", LCSC Part Name="33Ω ±0.1% 166.667mW", Manufacturer=UNI-ROYAL(厚声), Operating Temperature Range=-55℃~+155℃, Overload Voltage (Max)=75V, Power(Watts)=166.667mW, Temperature Coefficient=±25ppm/℃, Tolerance=±0.1%, Add into BOM=yes, Convert to PCB=yes, Datasheet=https://atta.szlcsc.com/upload/public/pdf/source/20190404/C61958_CC7C54455B4CAE3BAEFDAC24C5E38D4A.pdf, Device=TC0325B330JT5E, Manufacturer Part=TC0325B330JT5E, Name=33Ω, Supplier=LCSC, Supplier Footprint=0603, Supplier Part=C61958, Symbol=TC0325B330JT5E
RJ1: "RJ45", JLCPCB Part Class="Extended Part", LCSC Part Name="RJ45 1*1 带灯", Manufacturer=HANRUN(汉仁), Ratings=-, Add into BOM=yes, Connector Type=RJ插座, Convert to PCB=yes, Datasheet=https://atta.szlcsc.com/upload/public/pdf/source/20151014/1457707458793.pdf, Device=HR961160C, LED=有, Manufacturer Part=HR961160C, Name=HR961160C, Number of Ports=1, Shielding=-, Supplier=LCSC, Supplier Footprint=插件, Supplier Part=C55683, Symbol=HR961160C, USOC Codes=RJ45
U1 U2: BOM_JLCPCB Part Class="Basic Part", BOM_Manufacturer=EXAR, BOM_Manufacturer Part=SP3485EN-L/TR, BOM_Supplier=LCSC, BOM_Supplier Part=C8963, spicePre=U, spiceSymbolName=SP3485EN-L/TR
U3: BOM_JLCPCB Part Class="Extended Part", BOM_Manufacturer="Aosong (Guangzhou) Elec", BOM_Manufacturer Part=DHT11, BOM_Supplier=LCSC, BOM_Supplier Part=C117051, Contributor=LCSC, spicePre=U, spiceSymbolName=DHT11
U4: "以太网控制芯片", JLCPCB Part Class="Extended Part", Manufacturer=WIZNET, Supply Current=132mA, Supply Voltage="2.97V ~ 3.63V", Add into BOM=yes, Convert to PCB=yes, Datasheet=https://atta.szlcsc.com/upload/public/pdf/source/20140704/1457707126739.pdf, Device=W5500, Interface=SPI, LCSC Part Name=W5500, Manufacturer Part=W5500, Name=W5500, Number of Channels=-, Standards="10/100 Base-T/TX PHY", Supplier=LCSC, Supplier Footprint=LQFP-48_7x7x05P, Supplier Part=C32843, Symbol=W5500, Type="Ethernet Controllers"
U5: "LM2576S-5.0", BOM_JLCPCB Part Class="Extended Part", BOM_Manufacturer=minos(迈诺斯), BOM_Manufacturer Part=LM2576S-5.0, BOM_Supplier=LCSC, BOM_Supplier Part=C2920854, Contributor=LCSC, spicePre=U, spiceSymbolName=LM2576S-5.0_C2920854
U6: "AMS1117-3.3", BOM_JLCPCB Part Class="Extended Part", BOM_Manufacturer=KEXIN, BOM_Manufacturer Part=AMS1117-3.3, BOM_Supplier=LCSC, BOM_Supplier Part=C369933, Contributor=LCSC, spicePre=U, spiceSymbolName=AMS1117-3.3_C369933
U7: "Flaah:64/RAM:20/IO:36", BOM名称=32位STM单片机, 学习资源=www.ooocke.com, 版权归属=源创客
U8: JLCPCB Part Class="Extended Part", Manufacturer=WCH(南京沁恒), Supply Voltage="3.3V, 5V", Add into BOM=yes, Convert to PCB=yes, Data Rate=2Mbps, Datasheet=https://atta.szlcsc.com/upload/public/pdf/source/20200819/C14267_9F0B4B8160AEBA86F3219E64956E4601.pdf, Device=CH340G, LCSC Part Name=CH340G, Manufacturer Part=CH340G, Name=CH340G, Number of Drivers/Receivers=-, Protocol="USB 2.0", Supplier=LCSC, Supplier Footprint=SOP-16_150mil, Supplier Part=C14267, Symbol=CH340G, Type=Transceiver
USB1: BOM_JLCPCB Part Class="Extended Part", BOM_Manufacturer=XUNPU(讯普), BOM_Manufacturer Part=TYPEC-304A-ACP16O, BOM_Supplier=LCSC, BOM_Supplier Part=C2909610, Contributor=LCSC, spicePre=U, spiceSymbolName=TYPEC-304A-ACP16O
X1: "25Mhz晶振", Frequency Stability=-, JLCPCB Part Class="Extended Part", LCSC Part Name="25MHz 12pF", Manufacturer=JINGYOU(晶优), Add into BOM=yes, Convert to PCB=yes, Crystal Type=-, Datasheet=https://atta.szlcsc.com/upload/public/pdf/source/20190902/C394378_A3BD37707606032D901F464AD0418325.pdf, Device=JYXT32S4-025.00000-93E4C0, Frequency Tolerance=-, Load Capacitance=-, Manufacturer Part=JYXT32S4-025.00000-93E4C0, Name=-, Operating Temperature=-, Supplier=LCSC, Supplier Footprint=SMD3225-4P, Supplier Part=C394378, Symbol=JYXT32S4-025.00000-93E4C0
Y1 Y2: library part XTAL, "Crystal Oscillator"
  Y1: LatestRevisionDate=17-Jul-2002, LatestRevisionNote="Re-released for DXP Platform.", PackageDescription="Crystal, Thru-Hole; 2 Leads; Body 3.1 x 8.2 mm (Dia.xH)", PackageReference=R38, Published=8-Jun-2000, Publisher="Altium Limited"

## Free pads (board coordinates)
  round 0 hole 3.2: 2(6.54,13.398) 2(6.54,68.54) 2(70.999,13.398) 2(70.999,68.54)

## Via types
v1: diameter 0.61, hole 0.305, Top Layer to Bottom Layer, 148 vias
v2: diameter 1.27, hole 0.711, Top Layer to Bottom Layer, 7 vias

## Nets (pads, with @x,y where several pads share a name; then routed paths per layer and width w, separated by ;. In a path a pad name is that pad's centre, name@x,y a point inside that pad or via, vN(x,y) a via of type N, cw(c..) or ccw(c..) an arc to the next point about the centre after c; other vN are vias at no path point)
+3.3V: C1.1 C4.1 C5.1 C6.1 C7.1 C8.1 C23.1 C26.2 C27.2 C28.2 C29.2 CN2.3 L2.1 P1.1 P1.6 Q4.2 R1.2 R2.1 R3.1 R6.2 R11.2 R28.2 R30.2 R31.2 R34.2 R35.1 R36.1 R39.1 U1.8 U2.8 U3.1 U6.2 U6.4 U7.1 U7.9 U7.24 U7.36 U7.48 | length 257.3
  Top Layer w0.254: U3.1 8.126,53.469 ; R1.2@6.733,61.191 R2.1 8.382,59.337 C8.1 8.126,59.081 8.126,53.469 ; C1.1 10.21,20.955 R6.2 10.251,22.062 v1(12.7,24.511) 12.704,24.507 R36.1 ; CN2.3 10.263,31.623 8.126,33.76 C6.1 8.126,53.469 ; C5.1 14.986,35.56 v1(15.621,36.195) 16.22,36.794 U7.24 17.697,37.128 v2(20.447,39.878) ; v1(14.986,63.754) 15.153,63.754 17.098,61.809 R34.2 ; U7.9 19.197,41.128 v2(20.447,39.878) ; U2.8 20.955,22.876 21.971,23.892 21.971,25.4 ; U7.36 23.197,37.128 v2(20.447,39.878) ; U7.1 23.197,42.628 ; R31.2 22.35,25.021 21.971,25.4 ; R30.2 22.618,28.579 21.971,27.932 21.971,25.4 ; U7.48 23.197,42.628 ; C7.1 26.711,52.705 v1(27.727,51.689) Q4.2 ; v1(28.055,46.359) 28.061,46.353 R11.2 ; 46.103,42.865 46.171,42.797 C4.1 ; R3.1 61.887,43.013 U1.8 v1(63.627,42.164) ; v2(20.447,39.878) 23.197,42.628
  Top Layer w0.3: R28.2 34.699,41.198 P1.6
  Top Layer w0.762: R39.1 35.802,44.45 35.814,44.438 ; P1.6 34.699,43.323 35.814,44.438 ; 36.195,47.255 36.195,44.819 35.814,44.438 ; C26.2 37.676,47.255 36.199,47.255 36.199,49.694 37.297,50.792 U6.4 ; C23.1 38.465,57.388 37.297,56.22 U6.4 ; L2.1 38.735,37.85 v2(38.794,37.909) ; C28.2@40.581,44.617 C27.2 ; 41.152,44.454 41.154,44.452 ; U6.2 U6.4 ; P1.1@45.402,42.164 46.103,42.865 R35.1
  Bottom Layer w0.254: U3.1 6.731,59.436 11.049,63.754 v1(14.986,63.754) ; v1(15.621,36.195) 11.303,31.877 CN2.3 12.7,30.226 v1(12.7,24.511) 12.7,23.749 14.982,21.467 v1(20.955,21.467) ; v2(20.447,39.878) 25.802,39.878 28.055,42.131 v1(28.055,46.359) 28.055,51.361 v1(27.727,51.689) ; P1.1 44.83,42.16 49.362,37.628 58.075,37.628 62.611,42.164 v1(63.627,42.164)
  Bottom Layer w0.762: v2(20.447,39.878) 26.416,33.909 29.464,33.909 34.83,39.275 34.83,40.231 ; P1.6@34.83,42.164 34.83,40.231 ; v2(38.794,37.909) 37.152,37.909 34.83,40.231 ; P1.1@44.83,42.16 44.83,41.274 43.787,40.231 34.83,40.231
+5V: C19.1 C20.1 C21.1 C22.1 C34.1 C35.1 CN1.1 L1.1 U5.4 U6.3 U8.16 USB1.A4B9 USB1.B4A9 | length 26.7
  Top Layer w0.4: CN1.1 21.296,68.58 29.25,68.58 ; USB1.B4A9 27.828,67.158 29.25,68.58 ; C34.1 39.342,65.098 C35.1 37.518,65.024 36.068,65.024 34.669,63.625 U8.16 32.628,63.958 USB1.A4B9 32.628,67.573 31.621,68.58 29.25,68.58
+12V: C3.1 CN5.1 P2.1 U5.1 | length 106.2
  Bottom Layer w1.27: CN5.1 17.526,13.843 20.193,11.176 61.722,11.176 67.818,17.272 67.818,35.56 71.937,39.679 71.937,59.508 69.469,61.976 P2.1@66.294,61.976
ACTLED: RJ1.2 U4.27 | length 37.9
  Top Layer w0.254: v1(29.21,27.686) 29.21,25.673 30.019,24.864 U4.27 ; RJ1.2 55.31,31.434 v1(55.88,32.004)
  Bottom Layer w0.254: v1(29.21,27.686) 29.21,28.194 33.02,32.004 v1(55.88,32.004)
AGND: C2.1 C9.1 C10.2 C13.2 C14.2 C15.2 C16.2 C17.2 C18.2 R13.1 R14.1 R15.1 R16.2 R17.1 R18.1 R29.1 R45.1 U4.3 U4.9 U4.14 U4.16 U4.19 U4.23 U4.29 U4.48 X1.2 X1.4 | length 62.5
  Top Layer w0.254: v1(22.098,22.987) C17.2 24.938,24.557 X1.4 ; C2.1 25.671,25.669 X1.4 ; X1.2 26.121,24.557 X1.4 ; R18.1 29.914,11.615 30.353,11.176 32.392,11.176 R17.1@34.105,12.889 ; U4.29 33.941,23.864 36.465,21.34 36.449,21.324 v1(36.449,20.347) ; R17.1@34.105,12.704 R15.1 R14.1 R13.1 ; v1(34.199,25.654) U4.23 ; U4.19 v2(36.199,29.333) ; U4.16 37.699,29.188 38.699,30.188 ; U4.14 38.699,30.188 ; v1(39.175,24.638) 39.449,24.364 U4.9 ; U4.48 v1(39.199,20.924) 39.639,21.364 U4.3 44.889,21.364 R29.1 ; R16.2 39.624,31.113 38.699,30.188
  Top Layer w0.762: C9.1 32.886,32.891 C10.2 34.678,32.896 C15.2@34.929,33.147 ; R45.1 C16.2@34.929,34.798 ; C13.2 34.929,36.299 C16.2@34.929,34.798 ; v2(36.199,29.333) 34.929,30.603 C14.2 C15.2@34.929,33.147 ; C15.2@34.929,33.147 C16.2@34.929,34.798
  other v1: 66,12 54.483,13.781 58.547,13.97 49.5,15 52.5,15 61.5,15 40.255,17.509 32.477,17.53 51,18 54,18 57,18 60,18 63,18 41.652,18.568 27.028,18.945 25.822,19.822 58.5,21 61.5,21 64.5,21 36.445,21.086 63,24 72,24 60.704,24.575 61.5,27 64.5,27 70.5,27 73.5,27 40.54,28.131 39.928,29.337 72,30 58.5,33 61.5,33 50.905,34.876 54,36 57,36 60,36 63,36
BOOT0: R33.1 R44.1 U7.44 | length 16.4
  Top Layer w0.254: U7.44 26.481,40.628 27.338,41.485 27.338,44.209 23.495,48.052 23.495,49.657 24.255,50.417 R33.1 R44.1
CH340D+: U8.5 USB1.A6 USB1.B6 | length 13.3
  Top Layer w0.254: U8.5 28.752,58.545 29.478,59.271 USB1.B6 29.478,67.68 29.743,67.945 30.353,67.945 30.478,67.82 USB1.A6
CH340D-: U8.6 USB1.A7 USB1.B7 | length 13.1
  Top Layer w0.254: U8.6 28.827,57.275 29.978,58.426 29.978,65.024 ; USB1.A7 29.978,65.024 ; USB1.B7 30.978,65.37 30.632,65.024 29.978,65.024
DHT11_DATA: U3.2 U7.11 | length 15.6
  Top Layer w0.254: v1(16.002,46.01) 17.49,46.01 18.197,45.303 U7.11
  Bottom Layer w0.254: U3.2 9.688,52.324 v1(16.002,46.01)
DUPLED: LED3.2 U4.26 | length 6.9
  Top Layer w0.254: LED3.2 29.331,28.573 29.972,27.932 29.972,26.035 30.643,25.364 U4.26
GND: C1.2 C3.2 C4.2 C5.2 C6.2 C7.2 C8.2 C19.2 C20.2 C21.2 C22.2 C23.2 C26.1 C27.1 C28.1 C29.1 C31.1 C32.1 C33.1 C34.2 C35.2 C36.2 C37.2 C38.2 C39.2 C40.2 CN1.2 CN2.4 CN5.2 D1.3 D2.3 D3.2 K1.1 P1.4 P1.5 P2.2 Q1.2 Q2.2 R5.1 R8.1 R33.2 R40.2 R41.2 R45.2 U1.5 U2.5 U3.4 U5.3 U5.5 U5.6 U6.1 U7.8 U7.23 U7.35 U7.47 U8.1 USB1.A1B12 USB1.B1A12 | length 49
  Top Layer w0.254: v1(11.938,21.045) R8.1 ; D2.3 13.351,14.859 v1(14.605,14.859) ; U2.5 17.145,17.611 v1(17.165,17.591) ; U7.8 19.697,42.557 19.963,42.291 v1(20.193,42.291) ; v1(20.828,37.719) 21.969,37.719 22.697,36.991 U7.35
  Top Layer w0.4: USB1.B1A12 27.028,64.087 U8.1 ; USB1.A1B12 33.428,64.92 33.832,64.516 34.462,64.516 36.564,66.618 C35.2
  Top Layer w0.762: v2(28.956,32.512) 28.956,33.895 29.859,34.798 R45.2 ; P1.5 P1.4 ; C26.1 37.846,43.144 P1.4 ; P1.4@38.735,42.327 P1.4 ; v2(40.513,50.151) U6.1 U6.1@42.672,49.856 ; C39.2 41.525,36.191 C40.2 43.307,37.587 46.997,41.277 C4.2 ; C28.1@42.1,44.617 U6.1@42.1,50.019 ; 42.672,44.454 42.674,44.452 ; Q1.2 51.559,43.368 v1(52.07,43.368) R40.2
  other v1: 10,12 27,14 5,18 6,20 5,22 19.628,22.757 6,24 8,24 10,24 5,26 7,26 9,26 18.034,27.559 6,28 8,28 5,30 7,30 13.716,31.115 22.521,31.728 6,32 25.654,32.36 5,34 6,36 26.793,37.903 5,38 6,40 18.157,40.771 22,52 19,54 21,54 13,58 15,58 19,58 49,58 19,62 73,62 31.099,62.772 72,64 19,66 21,66 23,66 47,66 69,66 73,66 37,70 55,70 57,70 65,70 67,70
  other v2: 44.831,39.128
LED: LED4.2 U7.41 | length 6.4
  Top Layer w0.3: U7.41 26.106,39.128 29.397,42.418 LED4.2
LED_Tset: LED1.2 U7.40 | length 5.8
  Top Layer w0.3: U7.40 26.349,38.628 28.234,40.513 LED1.2
LINKLED: RJ1.11 U4.25 | length 44.6
  Top Layer w0.254: v1(30.861,26.924) 30.861,26.152 31.149,25.864 U4.25 ; RJ1.11 v1(56.007,21.894)
  Bottom Layer w0.254: v1(30.861,26.924) 30.861,28.956 33.02,31.115 56.515,31.115 57.277,30.353 57.277,23.164 v1(56.007,21.894)
NetC9_2: C9.2 U4.22 | length 6.2
  Top Layer w0.254: C9.2 31.103,30.627 32.516,29.214 33.72,29.214 34.699,28.235 U4.22
NetC10_1: C10.1 U4.20 | length 5.6
  Top Layer w0.254: C10.1 32.891,30.475 33.521,29.845 34.036,29.845 35.699,28.182 U4.20
NetC11_2: C11.2 RJ1.7 | length 5.7
  Top Layer w0.254: C11.2 46.815,26.154 RJ1.7
NetC12_2: C12.2 RJ1.8 | length 5.8
  Top Layer w0.254: C12.2 48.387,24.638 48.883,25.134 RJ1.8
NetC18_1: C18.1 R29.2 RJ1.10 RJ1.13 RJ1.14 | length 56.2
  Top Layer w0.254: R29.2 C18.1 48.269,22.742 48.621,23.094 RJ1.10
  Top Layer w0.5: RJ1.10 56.138,23.094 57.961,24.917 57.961,27.127 66.297,35.463 66.548,35.463 ; RJ1.13 68.114,17.865 66.548,19.431 66.548,35.463 ; RJ1.14 66.548,35.463
NetC24_1: C24.1 C25.1 | length 9.2
  Top Layer w0.254: C24.1 43.307,32.893 42.699,32.285 42.699,28.548 43.307,27.94 C25.1
NetC24_2: C24.2 R21.2 RJ1.5 | length 10.9
  Top Layer w0.254: R21.2 C24.2 47.625,32.893 48.133,32.385 48.133,29.564 49.503,28.194 RJ1.5
NetC25_2: C25.2 R26.2 R27.2 RJ1.6 | length 9.3
  Top Layer w0.254: R27.2 R26.2 C25.2 48.409,27.94 49.175,27.174 RJ1.6
NetC36_1: C36.1 U8.4 | length 3.8
  Top Layer w0.254: C36.1 25.019,61.722 26.926,59.815 U8.4
NetC37_1: C37.1 U8.7 Y2.2 | length 9.9
  Top Layer w0.254: Y2.2 21.336,60.676 23.717,58.295 C37.1 26.813,56.005 U8.7
NetC38_1: C38.1 U8.8 Y2.1 | length 7.3
  Top Layer w0.254: Y2.1 22.354,56.386 C38.1 25.148,56.386 26.799,54.735 U8.8
NetD3_1: D3.1 L1.2 U5.2 | length 21.2
  Top Layer w0.762: D3.1 43.88,69.683 L1.2 52.491,69.683 57.961,64.213 U5.2
NetD4_1: D4.1 Q3.3 R39.2 | length 6.3
  Top Layer w0.3: R39.2 31.439,44.52 33.401,46.482 ; Q3.3 33.379,46.504 33.401,46.482 ; D4.1 33.401,46.482
NetLED1_1: LED1.1 R28.1 | length 2.6
  Top Layer w0.3: R28.1 30.609,39.086 LED1.1 LED1.1@32.129,40.42
NetLED2_1: LED2.1 R30.1 | length 2.2
  Top Layer w0.254: R30.1 23.876,30.607 LED2.1
NetLED3_1: LED3.1 R31.1 | length 2.9
  Top Layer w0.254: R31.1 23.372,26.541 LED3.1
NetLED4_1: LED4.1 R11.1 | length 4
  Top Layer w0.3: R11.1 29.464,44.069 30.099,43.434 31.02,43.434 LED4.1
NetQ1_1: Q1.1 R37.2 R40.1 | length 4.4
  Top Layer w0.3: Q1.1 52.576,41.084 R40.1 R37.2
NetQ1_3: Q1.3 R35.2 U1.2 U1.3 | length 18.7
  Top Layer w0.3: R35.2 48.004,44.704 49.276,44.704 ; Q1.3 49.276,42.398 49.276,44.704 ; U1.3 U1.2 57.404,40.894 58.166,41.656 58.166,42.799 56.261,44.704 49.276,44.704
NetQ2_1: Q2.1 R38.2 R41.1 | length 7.2
  Top Layer w0.254: R38.2 R41.1 16.637,29.591 17.649,30.603 19.182,30.603 Q2.1
NetQ2_3: Q2.3 R36.2 U2.2 U2.3 | length 8.5
  Top Layer w0.254: R36.2 18.034,22.987 18.415,23.368 U2.3 U2.2 19.622,24.866 Q2.3
NetQ3_1: Q3.1 R42.2 | length 1.9
  Top Layer w0.254: R42.2 34.332,52.497 Q3.1
NetQ3_2: Q3.2 R43.1 U8.14 | length 12.9
  Top Layer w0.254: Q3.2 30.648,52.705 R43.1 30.392,59.716 31.761,61.085 U8.14
NetQ4_1: Q4.1 R43.2 | length 2.8
  Top Layer w0.254: R43.2 30.643,50.934 Q4.1
NetQ4_3: Q4.3 R44.2 | length 3
  Top Layer w0.254: R44.2 29.469,48.897 Q4.3
NetR13_2: R13.2 U4.42 | length 6.1
  Top Layer w0.254: U4.42 36.199,17.522 37.846,15.875 38.358,15.875 38.954,15.279 R13.2
NetR14_2: R14.2 U4.41 | length 5.3
  Top Layer w0.254: U4.41 35.699,17.387 37.283,15.803 R14.2
NetR15_2: R15.2 U4.40 | length 4.8
  Top Layer w0.254: U4.40 35.199,17.125 35.613,16.711 R15.2
NetR16_1: R16.1 U4.10 | length 6.5
  Top Layer w0.254: U4.10 41.454,24.864 42.176,25.586 42.176,29.325 41.908,29.593 R16.1
NetR17_2: R17.2 U4.39 | length 5
  Top Layer w0.254: R17.2 33.893,16.534 34.699,17.34 U4.39
NetR18_2: R18.2 U4.38 | length 7.9
  Top Layer w0.254: R18.2 32.068,12.512 32.893,13.337 32.893,15.033 33.401,15.541 33.401,16.793 34.199,17.591 U4.38
NetR24_2: R24.2 RJ1.1 | length 4.4
  Top Layer w0.254: R24.2 51.812,36.453 52.324,35.941 RJ1.1
NetR25_2: R25.2 RJ1.12 | length 6
  Top Layer w0.254: R25.2 47.882,19.304 48.632,20.054 RJ1.12
NetR42_1: R42.1 U8.13 | length 8.9
  Top Layer w0.254: R42.1 31.369,53.94 31.369,59.277 31.907,59.815 U8.13
NOISE_ADC: CN2.2 U7.10 | length 25.5
  Top Layer w0.254: v1(18.161,42.164) 18.697,42.7 U7.10
  Bottom Layer w0.254: CN2.2 10.033,29.083 8.509,30.607 8.509,40.005 10.668,42.164 v1(18.161,42.164)
NOISE_INT: CN2.1 U7.16 | length 17.7
  Top Layer w0.254: CN2.1 12.954,28.194 12.954,39.731 14.351,41.128 U7.16
OSC_IN: C31.2 R32.2 U7.5 Y1.2 | length 10.2
  Top Layer w0.254: R32.2 C31.2 ; Y1.2 19.304,51.429 C31.2 ; U7.5 21.197,45.881 19.304,47.774 C31.2
OSC_OUT: C32.2 R32.1 U7.6 Y1.1 | length 13.8
  Top Layer w0.254: C32.2 R32.1 ; Y1.1 15.875,49.778 R32.1 ; U7.6 20.697,45.724 19.05,47.371 16.256,47.371 15.875,47.752 R32.1
PM_SENSER_RESET: CN1.6 R2.2 U7.15 | length 37.9
  Top Layer w0.254: R2.2 9.425,62.711 9.525,62.611 ; CN1.6 14.665,68.988 14.311,69.342 11.43,69.342 11.049,68.961 11.049,67.691 9.525,66.167 9.525,62.611 ; U7.15 14.125,41.628 9.525,46.228 9.525,62.611
PM_SENSER_SET: CN1.3 R1.1 U7.14 | length 54.3
  Top Layer w0.254: v1(10.795,66.375) 10.033,65.613 10.033,46.482 14.387,42.128 U7.14
  Top Layer w0.3: R1.1 9,65.005 9,66.404 10.505,67.909 10.505,69.306 11.176,69.977 17.78,69.977 18.415,69.342 CN1.3
  Bottom Layer w0.254: v1(10.795,66.375) 16.591,66.375 CN1.3
PMODE0: R9.2 U4.45 | length 9.3
  Top Layer w0.254: U4.45 37.699,17.927 38.195,17.431 39.324,17.431 40.952,15.803 43.379,15.803 43.942,15.24 R9.2
PMODE1: R10.2 U4.44 | length 8.1
  Top Layer w0.254: U4.44 37.199,17.792 38.1,16.891 39.153,16.891 40.677,15.367 41.938,15.367 42.294,15.01 R10.2
PMODE2: R12.2 U4.43 | length 6.8
  Top Layer w0.254: U4.43 36.699,17.641 37.957,16.383 38.859,16.383 40.624,14.618 R12.2
RS485_1A: D1.2 P2.3 R3.2 R4.2 U1.6 | length 22.7
  Top Layer w0.254: R3.2 v1(59.184,42.799) 59.184,40.892 60.452,39.624 U1.6 64.901,39.624 R4.2 66.755,39.501 D1.2
  Bottom Layer w0.254: v1(59.184,42.799) 59.184,47.119 P2.3@63.881,51.816
RS485_1B: D1.1 P2.4 R4.1 R5.2 U1.7 | length 15.6
  Top Layer w0.381: U1.7 64.897,40.894 R4.1 ; P2.4@66.294,46.863 65.024,45.593 R4.1 ; R5.2 70.676,41.211 D1.1 66.755,41.021 R4.1
RS485_3A: CN5.3 D2.2 R6.1 R7.1 U2.6 | length 31.3
  Top Layer w0.3: D2.2 12.258,18.133 R7.1 13.265,19.394 R6.1 10.251,14.768 12.065,12.954 20.066,12.954 CN5.3 20.828,17.272 19.217,17.272 18.415,18.074 U2.6
RS485_3B: CN5.4 D2.1 R7.2 R8.2 U2.7 | length 18.2
  Top Layer w0.3: D2.1 14.912,17.756 R7.2 R8.2 14.949,21.082 19.05,21.082 19.685,20.447 U2.7 19.685,18.288 20.046,17.927 22.713,17.927 CN5.4
RST: C33.2 D4.2 K1.2 R34.1 U7.7 | length 56.3
  Top Layer w0.254: K1.2 13.415,61.642 15.113,59.944 v1(15.621,59.944) R34.1 C33.2 ; v1(18.542,46.482) 19.304,46.482 20.197,45.589 U7.7 ; v1(31.149,47.942) 31.262,47.83 D4.2
  Bottom Layer w0.254: v1(18.542,46.482) 17.145,47.879 17.145,58.42 v1(15.621,59.944) 15.621,60.96 18.542,63.881 22.86,63.881 31.149,55.592 v1(31.149,47.942)
RX1: U1.1 U7.31 U8.2 | length 70.2
  Top Layer w0.254: U7.31 20.697,34.29 21.84,33.147 23.622,33.147 26.289,35.814 v1(28.321,35.814) ; v1(25.781,63.246) 26.672,62.355 U8.2 ; v1(54.737,42.164) U1.1
  Bottom Layer w0.254: v1(25.781,63.246) 32.385,56.642 32.385,43.434 ; v1(28.321,35.814) 28.321,37.127 32.385,41.191 32.385,43.434 ; v1(54.737,42.164) 49.53,42.164 46.99,44.704 33.655,44.704 32.385,43.434
RX2: CN1.5 U7.13 | length 32.4
  Top Layer w0.254: CN1.5 14.518,66.802 12.319,66.802 10.541,65.024 10.541,46.736 14.649,42.628 U7.13
RX3: U2.1 U7.22 | length 19.1
  Top Layer w0.254: U7.22 17.3,38.128 v1(18.034,38.862) ; U2.1 v1(20.955,26.416)
  Bottom Layer w0.254: v1(18.034,38.862) 18.034,35.814 16.002,33.782 16.002,32.286 19.332,28.956 19.431,28.956 20.955,27.432 v1(20.955,26.416)
RXN: C12.1 R27.1 U4.5 | length 14.9
  Top Layer w0.254: U4.5 41.773,22.364 42.31,22.902 42.31,24.335 42.613,24.638 v1(43.688,24.638) C12.1 ; v1(43.561,30.353) 44.45,31.242 R27.1
  Bottom Layer w0.254: v1(43.561,30.353) 42.418,29.21 42.418,25.908 v1(43.688,24.638)
RXP: C11.1 R26.1 U4.6 | length 11.4
  Top Layer w0.254: U4.6 41.652,22.864 41.908,23.12 41.908,24.628 v1(43.569,26.289) C11.1 ; v1(43.561,29.083) 44.069,29.591 R26.1
  Bottom Layer w0.254: v1(43.561,29.083) 43.569,29.075 v1(43.569,26.289)
SCL: U7.42
SDA: U7.43
SPDLED: LED2.2 U4.24 | length 7.8
  Top Layer w0.254: LED2.2 29.66,30.607 31.565,28.702 33.278,28.702 33.699,28.281 U4.24
SWCLK: P1.3 U7.37 | length 18.2
  Top Layer w0.3: U7.37 32.683,37.128 36.322,40.767 39.175,40.767 P1.3
SWDIO: P1.2 U7.34 | length 25.4
  Top Layer w0.3: U7.34 22.197,34.318 22.479,34.036 23.495,34.036 25.912,36.453 32.869,36.453 36.548,40.132 40.54,40.132 P1.2
TX1: R37.1 U1.4 U7.30 U8.3 | length 83.3
  Top Layer w0.254: U7.30 20.197,34.032 21.592,32.637 23.81,32.637 25.336,34.163 26.099,34.925 v1(27.559,34.925) ; v1(25.781,61.976) 26.672,61.085 U8.3 ; R37.1 53.344,38.354 v1(54.864,38.354) U1.4
  Bottom Layer w0.254: v1(25.781,61.976) 31.877,55.88 31.877,41.529 27.559,37.211 v1(27.559,34.925) 29.083,34.925 32.893,38.735 32.893,43.18 33.909,44.196 46.482,44.196 52.324,38.354 v1(54.864,38.354)
TX2: CN1.4 U7.12 | length 33
  Top Layer w0.254: CN1.4 15.26,66.294 12.827,66.294 11.049,64.516 11.049,46.978 13.922,44.105 U7.12
TX3: R38.1 U2.4 U7.21 | length 22.2
  Top Layer w0.254: v1(14.224,38.608) 14.244,38.628 U7.21
  Top Layer w0.381: R38.1 14.986,26.797 v1(16.129,25.654) 16.98,24.803 U2.4
  Bottom Layer w0.254: v1(14.224,38.608) 16.256,38.608 17.526,37.338 17.526,36.068 15.494,34.036 15.494,32.131 16.129,31.496 v1(16.129,25.654)
TXN: R20.2 RJ1.4 U4.1 | length 34.5
  Top Layer w0.254: U4.1 41.739,20.364 v1(42.799,19.304) ; R20.2 47.371,36.195 48.641,34.925 48.641,30.353 49.78,29.214 RJ1.4 v1(55.88,29.214)
  Bottom Layer w0.254: v1(42.799,19.304) 52.709,29.214 v1(55.88,29.214)
TXP: R19.2 RJ1.3 U4.2 | length 32.1
  Top Layer w0.254: U4.2 42.382,20.864 v1(42.799,20.447) ; R19.2 49.149,30.615 49.53,30.234 RJ1.3 55.872,30.234 v1(55.88,30.226)
  Bottom Layer w0.254: v1(42.799,20.447) 43.18,20.447 52.959,30.226 v1(55.88,30.226)
VCCA_3.3V: C13.1 C14.1 C15.1 C16.1 C39.1 C40.1 L2.2 R9.1 R10.1 R12.1 R19.1 R20.1 R21.1 R22.1 R23.1 R24.1 R25.1 U4.4 U4.8 U4.11 U4.15 U4.17 U4.21 U4.28 | length 92.4
  Top Layer w0.254: U4.28 35.425,24.364 ; U4.21 35.199,24.59 35.425,24.364 ; C14.1 36.449,30.734 37.199,29.984 U4.17 37.199,23.892 ; U4.15 38.199,24.892 ; U4.4 37.925,21.864 v2(36.548,23.241) ; U4.8 37.171,23.864 ; U4.11 38.671,25.364 38.199,24.892 ; R20.1 45.16,37.54 45.589,37.969 R19.1 50.796,37.969 R24.1 ; 35.425,24.364 v2(36.548,23.241) ; v2(36.548,23.241) 37.171,23.864 ; 37.171,23.864 37.199,23.892 ; 37.199,23.892 38.199,24.892
  Top Layer w0.762: R22.1 v1(29.851,15.01) R23.1@29.851,15.839 ; C13.1 36.348,31.254 C14.1 ; C15.1 36.837,32.501 L2.2 40.121,32.501 C39.1 42.164,33.528 C40.1 45.031,34.671 R21.1 45.16,34.546 R20.1 ; R12.1 R10.1 R9.1@43.799,12.702 ; R9.1 45.087,12.702 45.847,13.462 45.847,17.399 45.087,18.159 R25.1
  Bottom Layer w0.254: v1(29.851,15.01) 34.695,15.01 37.465,17.78 37.465,21.463 ; v2(36.548,23.241) 36.548,22.38 37.465,21.463 ; v1(45.085,18.161) 44.45,17.526 41.402,17.526 37.465,21.463
W5500_INTn: R23.2 U4.36 U7.46 | length 46.9
  Top Layer w0.254: v1(22.733,41.021) 23.34,41.628 U7.46 ; R23.2 v1(29.845,19.431) 29.845,19.556 30.653,20.364 U4.36
  Bottom Layer w0.254: v1(22.733,41.021) 22.225,41.529 19.939,41.529 18.8,40.39 18.8,36.826 21.082,34.544 21.082,30.521 28.235,23.368 34.29,23.368 34.798,22.86 34.798,20.447 33.782,19.431 v1(29.845,19.431)
W5500_MISO: U4.34 U7.27 | length 26.7
  Top Layer w0.254: U7.27 18.697,33.504 v1(18.8,33.401) ; U4.34 33.667,21.364 v1(33.893,21.59)
  Bottom Layer w0.254: v1(18.8,33.401) 18.8,30.857 29.464,20.193 32.496,20.193 v1(33.893,21.59)
W5500_MOSI: U4.35 U7.28 | length 21.8
  Top Layer w0.254: U7.28 19.197,34.02 v1(19.816,33.401) ; v1(30.734,21.045) 30.915,20.864 U4.35
  Bottom Layer w0.254: v1(19.816,33.401) 19.816,30.476 29.247,21.045 v1(30.734,21.045)
W5500_RST: R22.2 U4.37 U7.45 | length 56.5
  Top Layer w0.254: U7.45 25.991,41.128 v1(26.711,41.848) ; v1(31.381,18.669) 31.381,15.863 31.371,15.873 R22.2 31.962,14.182 32.512,14.732 32.512,15.397 32.869,15.754 32.869,16.891 33.699,17.721 U4.37
  Bottom Layer w0.254: v1(26.711,41.848) 25.273,40.41 22.173,40.41 21.562,41.021 19.939,41.021 19.177,40.259 19.177,36.957 21.59,34.544 21.59,30.734 28.448,23.876 34.417,23.876 35.433,22.86 35.433,20.193 35.421,20.193 33.897,18.669 v1(31.381,18.669)
W5500_SCLK: U4.33 U7.26 | length 26
  Top Layer w0.254: v1(17.78,33.401) 18.197,33.818 U7.26 ; v1(28.702,19.431) 28.702,20.41 30.156,21.864 U4.33
  Bottom Layer w0.254: v1(17.78,33.401) 17.78,31.242 28.702,20.32 v1(28.702,19.431)
W5500_SCSn: U4.32 U7.25 | length 28.7
  Top Layer w0.254: v1(16.768,33.401) 17.697,34.33 U7.25 ; U4.32 33.651,22.364 v1(33.893,22.606)
  Bottom Layer w0.254: v1(16.768,33.401) 17.657,34.29 19.939,34.29 20.574,33.655 20.574,30.353 28.321,22.606 v1(33.893,22.606)
W5500_XI: C17.1 U4.31 X1.1 | length 11.8
  Top Layer w0.254: C17.1 24.331,21.467 X1.1 25.671,21.459 26.302,20.828 28.273,20.828 30.309,22.864 U4.31
W5500_XO: C2.2 U4.30 X1.3 | length 6.7
  Top Layer w0.254: C2.2 27.938,24.624 X1.3 28.148,24.557 29.341,23.364 U4.30
pads on no net: CN1.7 CN1.8 CN2.5 CN2.6 RJ1.9 U3.3 U4.7 U4.12 U4.13 U4.18 U4.46 U4.47 U7.2 U7.3 U7.4 U7.17 U7.18 U7.19 U7.20 U7.29 U7.32 U7.33 U7.38 U7.39 U8.9 U8.10 U8.11 U8.12 U8.15 USB1. USB1.12 USB1.13 USB1.14 USB1.15 USB1.A5 USB1.A8 USB1.B5 USB1.B8
copper on no net:
  other v1: 55.88,26.152